# Altium PCB Connect.PcbDoc
Units mil, origin at the board's own origin, x right, y up, seen from the top; angles counter-clockwise.
Board outline 1771.65 x 900 mil, 2 copper layers (Top Layer, Bottom Layer); 4 components, 10 nets, 35 pads, 7 vias.
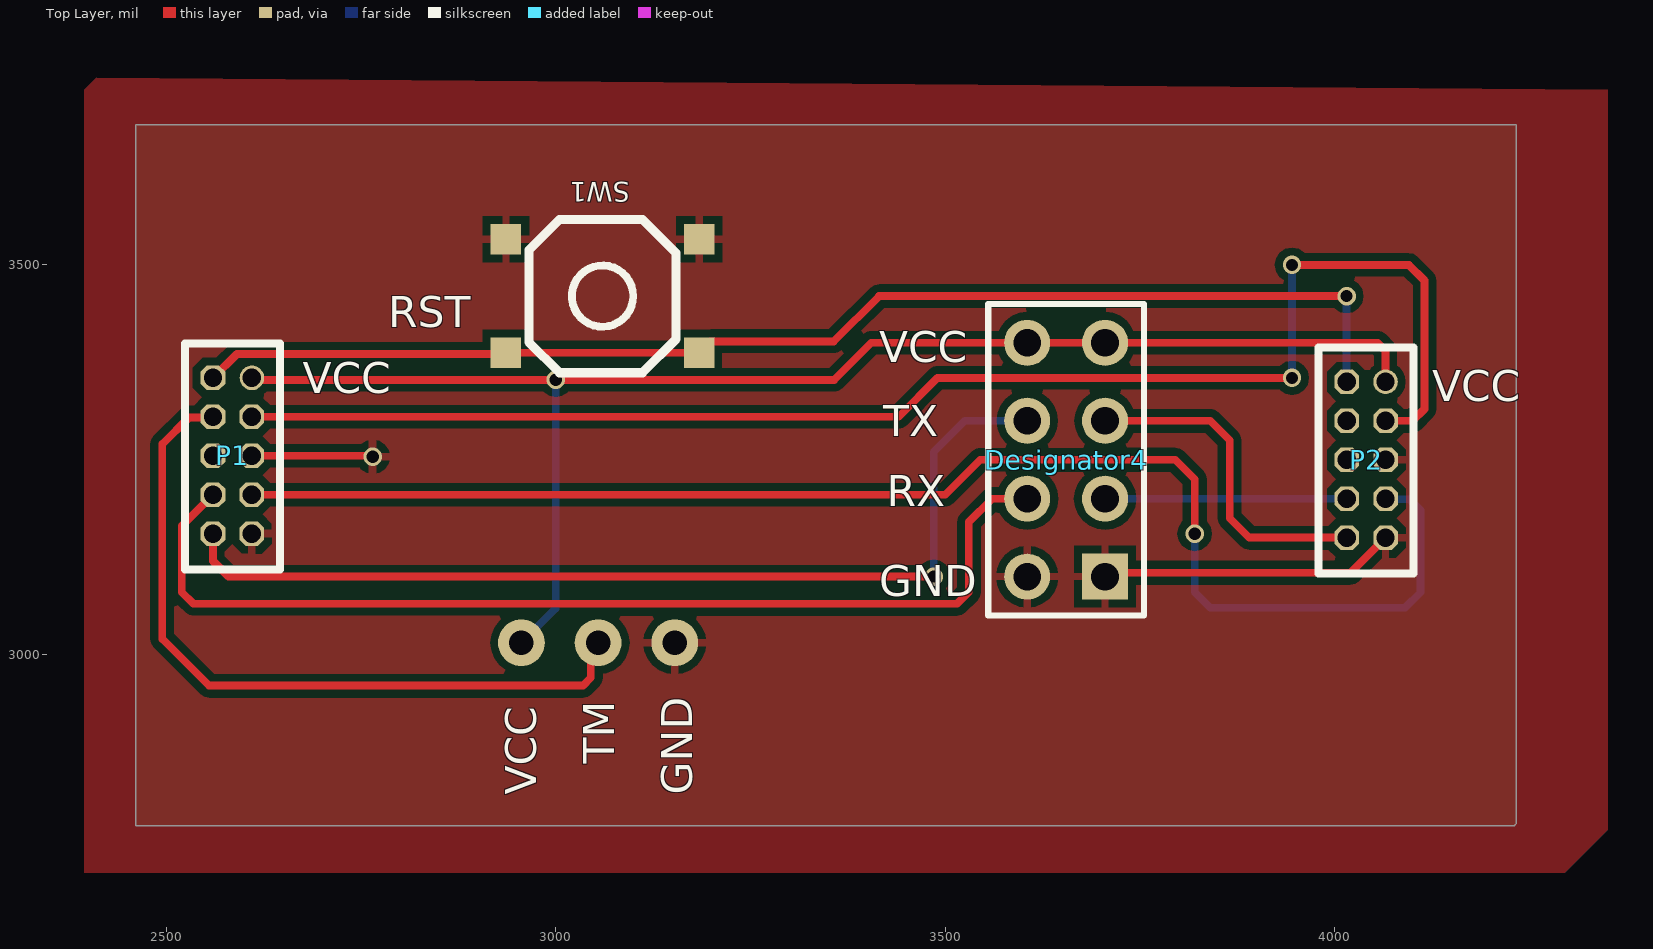
[diagram p0: Top Layer view]
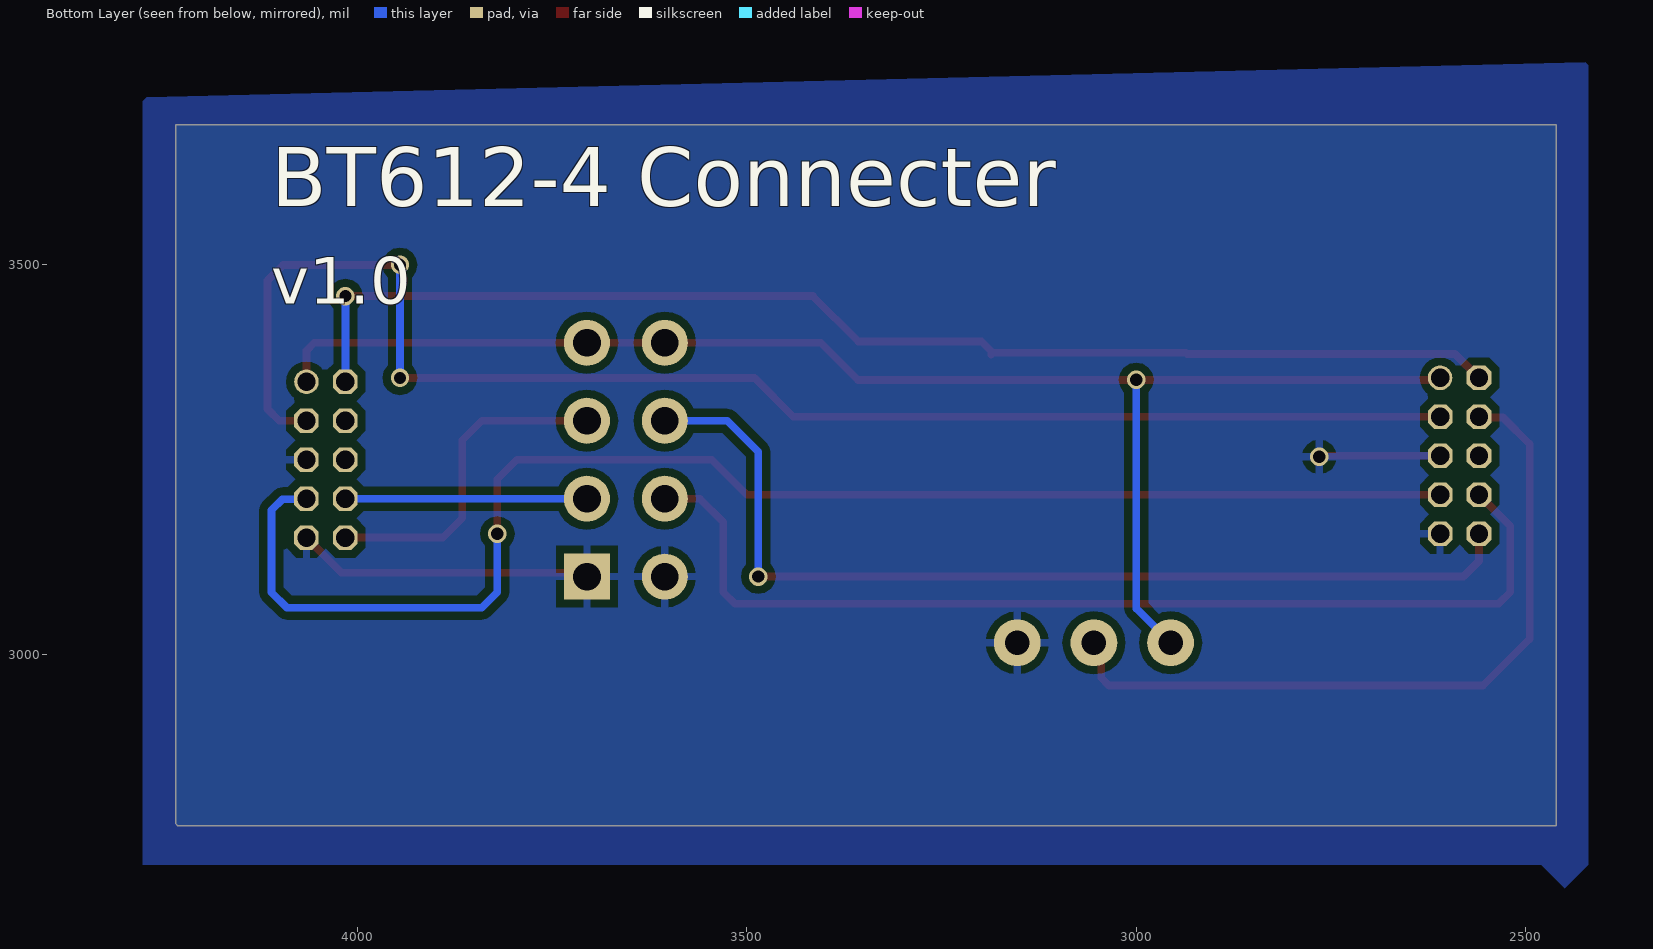
[diagram p1: Bottom Layer view, seen from below]

## Layer stack, top to bottom
Top Solder: solder mask 0.4, Solder Resist, Dk 3.5
Top Layer: signal copper 1.4
Dielectric 1: dielectric 12.6, FR-4, Dk 4.8
Bottom Layer: signal copper 1.4
Bottom Solder: solder mask 0.4, Solder Resist, Dk 3.5

## Board outline
2460.91,2780 4230.12,2780 4232.56,2782.44 4232.56,3680 2460.91,3680

## Design rules (kind name [scope] priority, off if disabled: settings)
Clearance [All] p1: gap=10 ignorepadtopadclearanceinfootprint=FALSE except(0: Arc-Hole Track-Hole SMDPad-Hole THPad-Hole Via-Hole Fill-Hole Poly-Hole Region-Hole Text-Hole)
PolygonConnect [All] p1: connectstyle=Relief reliefconductorwidth=10 reliefentries=4 polygonreliefangle="90 Angle" airgapwidth=10
RoutingVias [All] p1: holewidth=15.75 width=23.62 viastyle="Through Hole" minholewidth=15.75 minwidth=23.62 maxholewidth=15.75 maxwidth=23.62
SolderMaskExpansion [All] p1: expansion=4
Width [All] p1: maxlimit=10 minlimit=10 preferedwidth=10
30 further rules are at their usual default settings.

## Components (designator, comment, footprint, x,y, rotation, side; value= is the part's Value field where it differs from the comment)
Designator4 "Comment" HDR2X4 3705,3100 r90 top
P1 "Debug connecter 1.27mm" SIP5-X2-1.27 2585,3255 r270 top
P2 "Debug connecter 1.27mm" SIP5-X2-1.27 4040,3250 r270 top (schematic designator P1)
SW1 "Power_key" SW_PB_SMD_4X4 3060,3460 r180 top

## Footprints (in the part's own frame and the unit in brackets; to place one, negate y for a bottom-side part, rotate by r counter-clockwise, add the part's x,y. Pads: shape width x height; smd on the part's side, far side on the other; paste and mask are expansions set on the pad)
HDR2X4 [mm] "Connector; Header; 4x2 Position"
  rect 1.5x1.5 hole 0.9: 1(0,0)
  round 1.5 hole 0.9: 2(0,2.54) 3(2.54,0) 4(2.54,2.54) 5(5.08,0) 6(5.08,2.54) 7(7.62,0) 8(7.62,2.54)
  silkscreen extent -1.27,-1.27 8.89,3.81
SIP5-X2-1.27 [mm]
  round 0.8 hole 0.6: 1(-2.54,0.635)
  oct 0.8x0.8 hole 0.6: 2(-2.54,-0.635) 3(-1.27,0.635) 4(-1.27,-0.635) 5(0,0.635) 6(0,-0.635) 7(1.27,0.635) 8(1.27,-0.635) 9(2.54,0.635) 10(2.54,-0.635)
  silkscreen extent -3.66,-1.55 3.71,1.55
SW_PB_SMD_4X4 [mm]
  rect 1x1 smd: 1(-3.15,-1.85) 1(3.15,-1.85) 2(-3.15,1.85) 2(3.15,1.85)
  silkscreen extent -2.4,-2.5 2.4,2.5, body extent -3.2,-2.63 3.2,2.63, height 1.5

## Part data
P1 P2: library part "Header 5X2", "Header, 5-Pin, Dual row"
SW1: library part SW-PB, "Switch"

## Free pads (board coordinates)
  round 60 hole 31.5: 12(2955.87,3015) 12(3054.29,3015) 12(3152.72,3015)

## Via types
v1: diameter 23.62, hole 15.75, Top Layer to Bottom Layer, 7 vias

## Nets (pads, with @x,y where several pads share a name; then routed paths per layer and width w, separated by ;. In a path a pad name is that pad's centre, name@x,y a point inside that pad or via, vN(x,y) a via of type N, cw(c..) or ccw(c..) an arc to the next point about the centre after c; other vN are vias at no path point)
GND: Designator4.1 Designator4.2 P1.5 P1.9 P2.5 P2.9 pad.12@3152.72,3015 SW1.1 | length 536.3
  Top Layer w10: P1.5 2763.67,3255 v1(2765,3253.67) ; Designator4.1 3710,3105 4020,3105 P2.9
RST_N: P1.2 P2.2 SW1.2 | length 1611.6
  Top Layer w10: P1.2 2590.75,3385.75 2934.57,3385.75 2935.98,3387.17 SW1.2@3184.02,3387.17 ; SW1.2@3186.18,3385 SW1.2@3184.02,3387.17 ; v1(4015,3460) 3415,3460 3356.85,3401.85 3198.7,3401.85 SW1.2@3184.02,3387.17
  Bottom Layer w10: P2.2 v1(4015,3460)
SWCLK: P1.7 P2.7 | length 1846.8
  Top Layer w10: P1.7 3500,3205 3545,3250 3795,3250 3820,3225 v1(3820,3155)
  Bottom Layer w10: v1(3820,3155) 3820,3080 3840,3060 4090,3060 4110,3080 4110,3185 4095.75,3199.25 4065.75,3199.25 P2.7
SWDIO: P1.3 P2.3 | length 1900.2
  Top Layer w10: P1.3 3440,3305 3490,3355 v1(3945,3355) ; v1(3945,3500) 4095,3500 4115,3480 4115,3315 4100,3300 P2.3
  Bottom Layer w10: v1(3945,3355) v1(3945,3500)
TM: P1.4 pad.12@3054.29,3015 | length 957.3
  Top Layer w10: P1.4 2559.25,3304.25 2529.25,3304.25 2495,3270 2495,3020 2555,2960 3035,2960 3045,2970 3045,3005.71 pad.12@3054.29,3015
UART_RX: Designator4.4 P1.8 | length 1341.4
  Top Layer w10: P1.8 2520,3165 2520,3080 2535,3065 3515,3065 3530,3080 3530,3170 3560,3200 Designator4.4
UART_RX_I: Designator4.3 P2.8 | length 310
  Bottom Layer w10: Designator4.3 P2.8
UART_TX: Designator4.6 P1.10 | length 1264.9
  Top Layer w10: P1.10 2560,3120 2580,3100 v1(3485,3100)
  Bottom Layer w10: v1(3485,3100) 3485,3260 3525,3300 Designator4.6
UART_TX_I: Designator4.5 P2.10 | length 430.7
  Top Layer w10: Designator4.5 3840,3300 3865,3275 3865,3175 3890,3150 P2.10
VCC3: Designator4.7 Designator4.8 P1.1 P2.1 pad.12@2955.87,3015 | length 1875.6
  Top Layer w10: P1.1 2612.52,3352.48 v1(3000,3352.48) 3357.48,3352.48 3405,3400 Designator4.8 Designator4.7 4055,3400 4065,3390 P2.1
  Bottom Layer w10: pad.12@2955.87,3015 3000,3059.13 v1(3000,3352.48)
pads on no net: P1.6 P2.4 P2.6

## Polygon pours and split planes (outlines as drawn)
GND on Top Layer (solid, pour order 2): 2410,3740 2395,3725 2395,2720 4295,2720 4350,2775 4350,3725
GND on Top Layer (solid, pour order 0): 2355,3755
GND on Bottom Layer (solid, pour order 4): 2420,3760 2420,2730 2450,2700 2480,2730 4275,2730 4275,3710 4270,3715

## Silkscreen, mask and mechanical layers (free items; w line width, h text height)
Top Overlay:
  text "RST" at 2785,3420 h40
  text "VCC" at 3415,3375 h40
  text "VCC" at 2675,3335 h40
  text "VCC" at 4125,3325 h40
  text "TX" at 3420,3280 h40
  text "RX" at 3425,3190 h40
  text "GND" at 3415,3075 h40
  text "TM" at 3075,2860 h40 r90
  text "VCC" at 2975,2820 h40 r90
  text "GND" at 3175,2820 h40 r90
Bottom Overlay:
  text "BT612-4 Connecter" at 4110,3550 h130
  text "v1.0" at 4110,3450 h60
Top Solder:
  text "emmovo" at 3810,2820 h60
Mechanical 1:
  lines w10: 2460.91,2780 2460.91,3680 4232.56,3680 4232.56,2782.44 4230.12,2780 4200,2780 2460.91,2780